# Altium PCB RevB.PcbDoc (part 1 of 2)
Units mm, origin at the board's own origin, x right, y up, seen from the top; angles counter-clockwise.
Board outline 132.46 x 77.34 mm, 2 copper layers (Top Layer, Bottom Layer); 132 components, 78 nets, 535 pads, 141 vias.
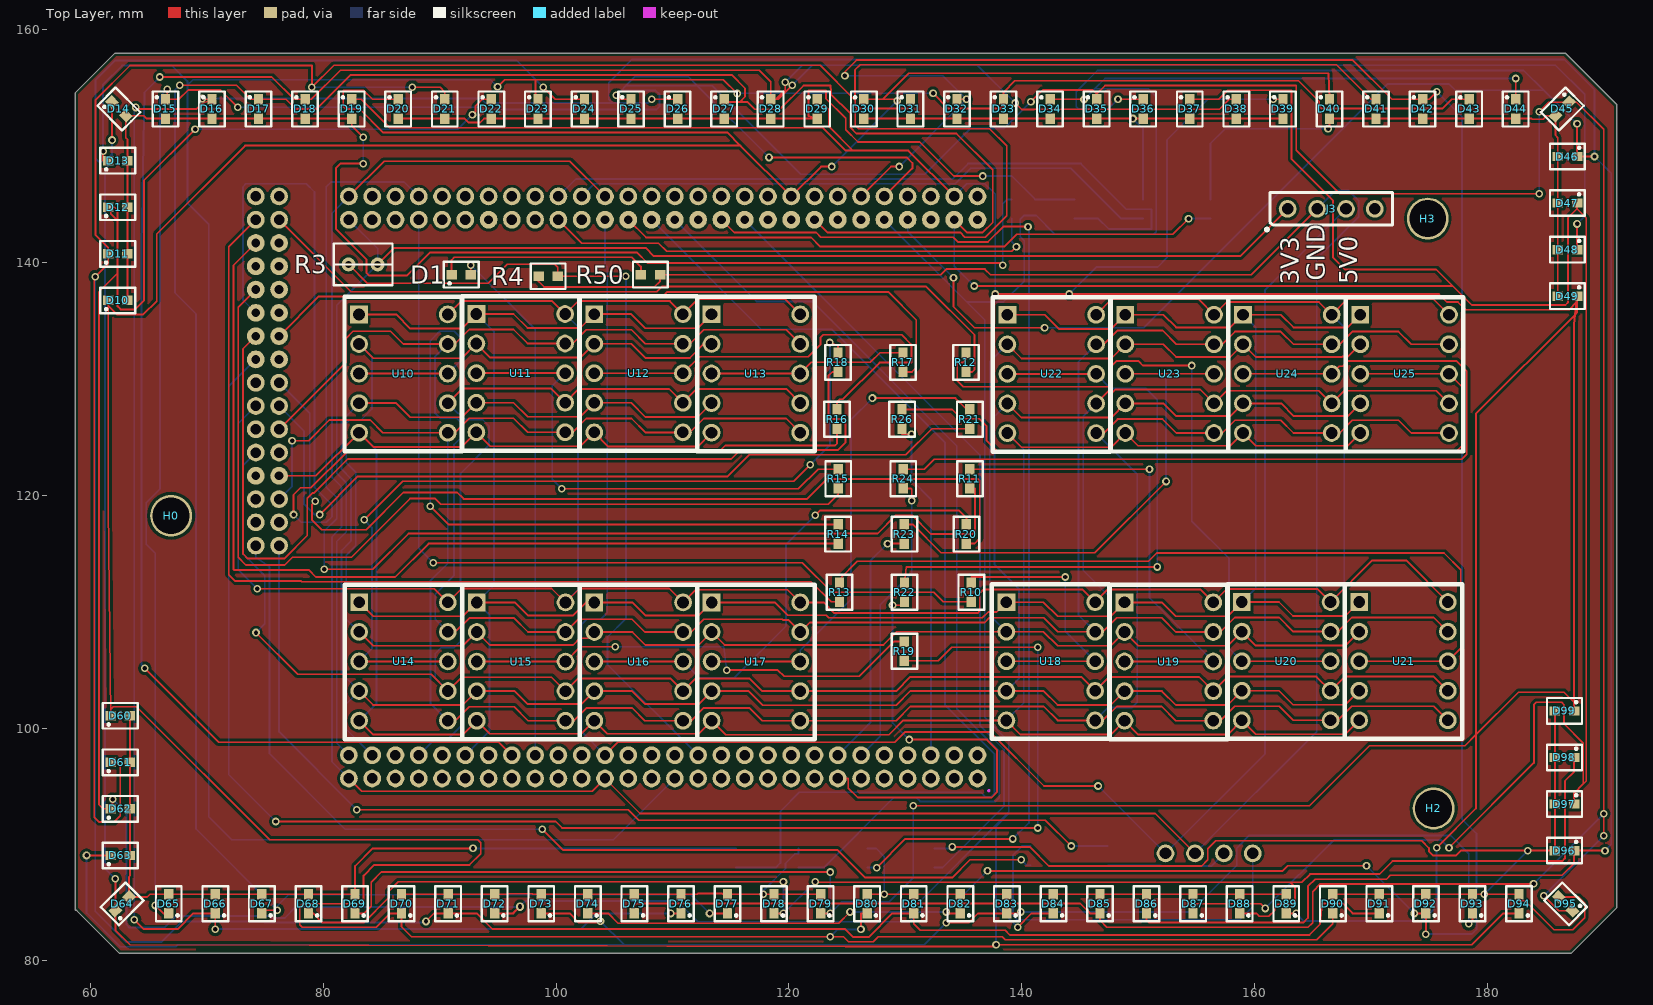
[diagram p0: Top Layer view]
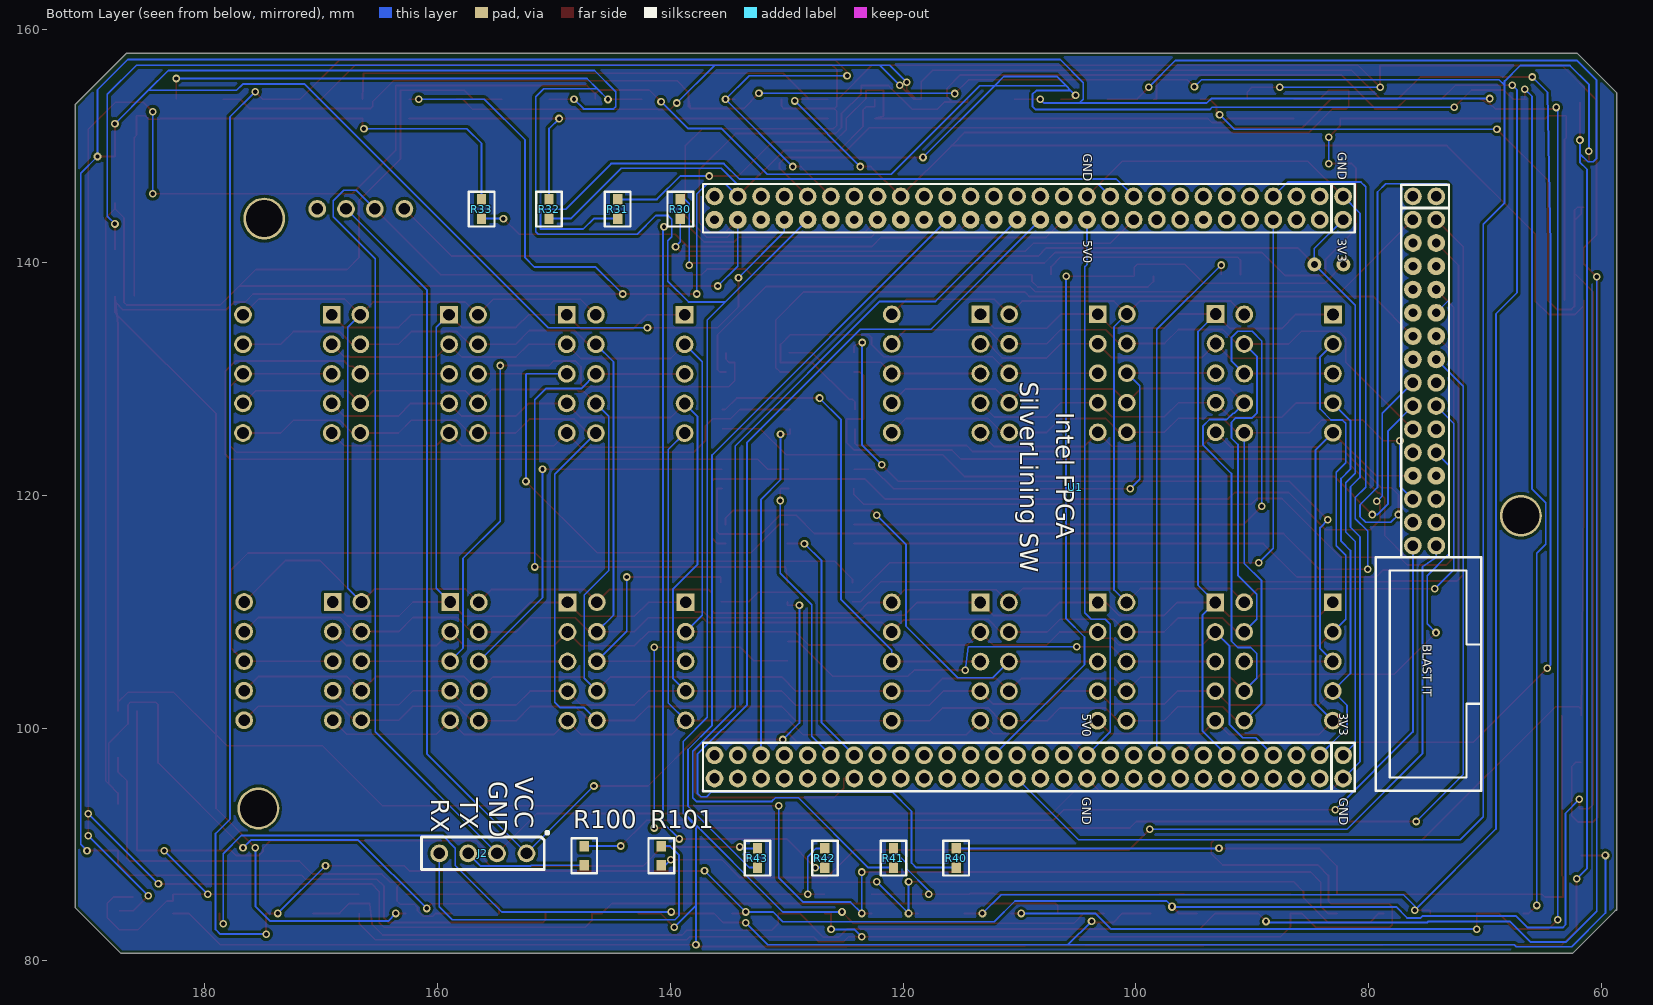
[diagram p1: Bottom Layer view, seen from below]

## Layer stack, top to bottom
Top Solder: solder mask 0.0102, Solder Resist, Dk 3.5
Top Layer: signal copper 0.0356
Dielectric1: dielectric 0.32, FR-4, Dk 4.8
Bottom Layer: signal copper 0.0356
Bottom Solder: solder mask 0.0102, Solder Resist, Dk 3.5

## Board outline
62.23,157.988 62.103,157.988 58.674,154.559 58.674,84.328 58.801,84.328 62.484,80.645 187.198,80.645 191.135,84.582 191.135,153.543 186.69,157.988

## Design rules (kind name [scope] priority, off if disabled: settings)
BoardOutlineClearance [All] p1: gap=0.254 ignorepadtopadclearanceinfootprint=FALSE
Clearance [All] p1: gap=0.254 ignorepadtopadclearanceinfootprint=FALSE except(0: Arc-Hole Track-Hole SMDPad-Hole THPad-Hole Via-Hole Fill-Hole Poly-Hole Region-Hole Text-Hole)
HoleSize [All] p1: absolutevalues=TRUE maxlimit=10 minlimit=0.381 maxpercent=80.000 minpercent=20.000
HoleToHoleClearance [All] p1: gap=0.481 allowstackedmicrovias=TRUE
MinimumAnnularRing [Not IsVia] p1: minimumring=0.18
MinimumSolderMaskSliver [All] p1: minsoldermaskwidth=0.064
PolygonConnect [All] p1: connectstyle=Relief reliefconductorwidth=0.254 reliefentries=4 polygonreliefangle="90 Angle" airgapwidth=0.254
RoomDefinition Uart [InComponentClass('Uart')] p1: confinementstyle=ConfineIn formatcopy=TRUE lockcomponents=FALSE outline 165.811,125.933 165.811,75.133 129.946,75.133 129.946,125.933
RoomDefinition Daylight_Sensor_Network [InComponentClass('Daylight_Sensor_Network')] p2: confinementstyle=ConfineIn formatcopy=TRUE lockcomponents=FALSE outline 77.978,136.144 110.744,136.144 110.744,148.133 77.978,148.133
RoomDefinition AFR_Bar_Termination_Resistors [InComponentClass('AFR_Bar_Termination_Resistors')] p3: confinementstyle=ConfineIn formatcopy=TRUE lockcomponents=FALSE outline 134.235,84.236 112.29,84.236 112.29,92.792 134.235,92.792
RoomDefinition Boost_Bar_Termination_Resistors [InComponentClass('Boost_Bar_Termination_Resistors')] p4: confinementstyle=ConfineIn formatcopy=TRUE lockcomponents=FALSE outline 157.934,140.345 135.988,140.345 135.988,148.545 157.934,148.545
RoomDefinition Core [InComponentClass('Core')] p5: confinementstyle=ConfineIn formatcopy=TRUE lockcomponents=FALSE outline 138.082,152.748 138.082,85.979 68.08,85.979 68.08,152.748
RoomDefinition LED_Readout_Termination_Resistors [InComponentClass('LED_Readout_Termination_Resistors')] p6: confinementstyle=ConfineIn formatcopy=TRUE lockcomponents=FALSE outline 121.234,100.711 138.43,100.711 138.43,135.498 121.234,135.498
RoomDefinition LED_Readout_and_Warning_Lights [InComponentClass('LED_Readout_and_Warning_Lights')] p7: confinementstyle=ConfineIn formatcopy=TRUE lockcomponents=FALSE outline 80.518,89.339 178.689,89.339 178.689,142.044 80.518,142.044
RoomDefinition Hole4 [InComponentClass('Hole4')] p8: confinementstyle=ConfineIn formatcopy=TRUE lockcomponents=FALSE outline 176.911,145.796 172.847,145.796 172.847,139.192 176.911,139.192
RoomDefinition Hole3 [InComponentClass('Hole3')] p9: confinementstyle=ConfineIn formatcopy=TRUE lockcomponents=FALSE outline 173.355,90.424 177.419,90.424 177.419,97.028 173.355,97.028
RoomDefinition Hole1 [InComponentClass('Hole1')] p10: confinementstyle=ConfineIn formatcopy=TRUE lockcomponents=FALSE outline 64.897,116.205 68.961,116.205 68.961,122.809 64.897,122.809
RoomDefinition Debug [InComponentClass('Debug')] p11: confinementstyle=ConfineIn formatcopy=TRUE lockcomponents=FALSE outline 172.136,137.871 172.136,146.304 158.115,146.304 158.115,137.871
RoomDefinition Boost_Bar [InComponentClass('Boost_Bar')] p12: confinementstyle=ConfineIn formatcopy=TRUE lockcomponents=FALSE outline 59.055,133.92 191.77,133.92 191.77,158.623 59.055,158.623
RoomDefinition AFR_bar [InComponentClass('AFR_bar')] p13: confinementstyle=ConfineIn formatcopy=TRUE lockcomponents=FALSE outline 58.166,80.137 192.532,80.137 192.532,104.244 58.166,104.244
RoutingPriority ClockPriority [InNet('XIN') OR InNet('XOUT') OR InNet('XIN32') OR InNet('XOUT32')] p1: routingpriority=80
RoutingPriority PowerPriority [InNet('1V8') OR InNet('3V3') OR InNet('VBAT') OR InNet('5V') OR InNet('GND') OR InNet('VDDANA') OR InNet('VDDUTMI') OR InNet('VDDPLL')] p2: routingpriority=90
RoutingPriority DiffPairsPriority [InNet('CAN_N')   OR InNet('CAN_P') OR InNet('USBD_N') OR InNet('USBD_P') OR InNet('USBH_N') OR InNet('USBH_P')] p3: routingpriority=100
RoutingVias [All] p1: holewidth=0.381 width=0.66 viastyle="Through Hole" minholewidth=0.381 minwidth=0.66 maxholewidth=0.381 maxwidth=0.66
SMDNeckDown [All] p1: percent=200.000
SilkToSilkClearance [All] p1: silktosilkclearance=0.152
SilkToSolderMaskClearance [IsPad] p1: minsilkscreentomaskgap=0.152 clearancetoexposedcopper=TRUE
SolderMaskExpansion [All] p1: expansion=0.102
Width SilkWidth [OnLayer('Top Overlay') or OnLayer('Bottom Overlay')] p1: maxlimit=2.54 minlimit=0.08 preferedwidth=0.127
Width [All] p2: maxlimit=0.2 minlimit=0.152 preferedwidth=0.152
24 further rules are at their usual default settings.

## Classes and differential pairs
component class Daylight_Sensor_Network: R3 R4
component class Uart: J2 R100 R101
component class LED_Readout_Termination_Resistors: R10 R11 R12 R13 R14 R15 R16 R17 R18 R19 R20 R21 R22 R23 R24 R26
component class LED_Readout_and_Warning_Lights: D1 R50 U10 U11 U12 U13 U14 U15 U16 U17 U18 U19 U20 U21 U22 U23 U24 U25
component class Hole4: H3
component class Hole3: H2
component class Hole1: H0
component class Debug: J3
component class Core: U1
component class Boost_Bar: D10 D11 D12 D13 D14 D15 D16 D17 D18 D19 D20 D21 D22 D23 D24 D25 D26 D27 D28 D29 D30 D31 D32 D33 D34 D35 D36 D37 D38 D39 D40 D41 D42 D43 D44 D45 D46 D47 D48 D49
component class Boost_Bar_Termination_Resistors: R30 R31 R32 R33
component class AFR_bar: D60 D61 D62 D63 D64 D65 D66 D67 D68 D69 D70 D71 D72 D73 D74 D75 D76 D77 D78 D79 D80 D81 D82 D83 D84 D85 D86 D87 D88 D89 D90 D91 D92 D93 D94 D95 D96 D97 D98 D99
component class AFR_Bar_Termination_Resistors: R40 R41 R42 R43

## Components (designator, comment, footprint, x,y, rotation, side; value= is the part's Value field where it differs from the comment)
D1 "WARNING" DIODE_0603 91.846,138.945 r180 top locked
D10 "" DIODE_0603 62.353,136.739 r180 top
D11 "" DIODE_0603 62.353,140.739 r180 top
D12 "" DIODE_0603 62.353,144.739 r180 top
D13 "" DIODE_0603 62.353,148.739 r180 top
D14 "" DIODE_0603 62.436,153.184 r135 top
D15 "" DIODE_0603 66.436,153.184 r90 top
D16 "" DIODE_0603 70.436,153.184 r90 top
D17 "" DIODE_0603 74.436,153.184 r90 top
D18 "" DIODE_0603 78.436,153.184 r90 top
D19 "" DIODE_0603 82.436,153.184 r90 top
D20 "" DIODE_0603 86.436,153.184 r90 top
D21 "" DIODE_0603 90.436,153.184 r90 top
D22 "" DIODE_0603 94.436,153.184 r90 top
D23 "" DIODE_0603 98.436,153.184 r90 top
D24 "" DIODE_0603 102.436,153.184 r90 top
D25 "" DIODE_0603 106.436,153.184 r90 top
D26 "" DIODE_0603 110.436,153.184 r90 top
D27 "" DIODE_0603 114.436,153.184 r90 top
D28 "" DIODE_0603 118.436,153.184 r90 top
D29 "" DIODE_0603 122.436,153.184 r90 top
D30 "" DIODE_0603 126.436,153.184 r90 top
D31 "" DIODE_0603 130.436,153.184 r90 top
D32 "" DIODE_0603 134.436,153.184 r90 top
D33 "" DIODE_0603 138.436,153.184 r90 top
D34 "" DIODE_0603 142.436,153.184 r90 top
D35 "" DIODE_0603 146.436,153.184 r90 top
D36 "" DIODE_0603 150.436,153.184 r90 top
D37 "" DIODE_0603 154.436,153.184 r90 top
D38 "" DIODE_0603 158.436,153.184 r90 top
D39 "" DIODE_0603 162.436,153.184 r90 top
D40 "" DIODE_0603 166.436,153.184 r90 top
D41 "" DIODE_0603 170.436,153.184 r90 top
D42 "" DIODE_0603 174.436,153.184 r90 top
D43 "" DIODE_0603 178.436,153.184 r90 top
D44 "" DIODE_0603 182.436,153.184 r90 top
D45 "" DIODE_0603 186.436,153.184 r45 top
D46 "" DIODE_0603 186.88,149.102 r0 top
D47 "" DIODE_0603 186.88,145.102 r0 top
D48 "" DIODE_0603 186.88,141.102 r0 top
D49 "" DIODE_0603 186.88,137.102 r0 top
D60 "" DIODE_0603 62.563,101.056 r180 top
D61 "" DIODE_0603 62.563,97.056 r180 top
D62 "" DIODE_0603 62.563,93.056 r180 top
D63 "" DIODE_0603 62.563,89.056 r180 top
D64 "" DIODE_0603 62.726,84.901 r225 top
D65 "" DIODE_0603 66.726,84.901 r270 top
D66 "" DIODE_0603 70.725,84.901 r270 top
D67 "" DIODE_0603 74.725,84.901 r270 top
D68 "" DIODE_0603 78.726,84.901 r270 top
D69 "" DIODE_0603 82.726,84.901 r270 top
D70 "" DIODE_0603 86.726,84.901 r270 top
D71 "" DIODE_0603 90.726,84.901 r270 top
D72 "" DIODE_0603 94.726,84.901 r270 top
D73 "" DIODE_0603 98.725,84.901 r270 top
D74 "" DIODE_0603 102.725,84.901 r270 top
D75 "" DIODE_0603 106.726,84.901 r270 top
D76 "" DIODE_0603 110.726,84.901 r270 top
D77 "" DIODE_0603 114.726,84.901 r270 top
D78 "" DIODE_0603 118.726,84.901 r270 top
D79 "" DIODE_0603 122.726,84.901 r270 top
D80 "" DIODE_0603 126.725,84.901 r270 top
D81 "" DIODE_0603 130.726,84.901 r270 top
D82 "" DIODE_0603 134.726,84.901 r270 top
D83 "" DIODE_0603 138.726,84.901 r270 top
D84 "" DIODE_0603 142.726,84.901 r270 top
D85 "" DIODE_0603 146.726,84.901 r270 top
D86 "" DIODE_0603 150.725,84.901 r270 top
D87 "" DIODE_0603 154.725,84.901 r270 top
D88 "" DIODE_0603 158.726,84.901 r270 top
D89 "" DIODE_0603 162.726,84.901 r270 top
D90 "" DIODE_0603 166.726,84.901 r270 top
D91 "" DIODE_0603 170.726,84.901 r270 top
D92 "" DIODE_0603 174.726,84.901 r270 top
D93 "" DIODE_0603 178.725,84.901 r270 top
D94 "" DIODE_0603 182.725,84.901 r270 top
D95 "" DIODE_0603 186.726,84.901 r315 top
D96 "" DIODE_0603 186.626,89.476 r0 top
D97 "" DIODE_0603 186.626,93.476 r0 top
D98 "" DIODE_0603 186.626,97.475 r0 top
D99 "" DIODE_0603 186.626,101.475 r0 top
H0 "STANDOFF HOLE" HOLE_3MM 66.929,118.237 r0 top locked
H2 "STANDOFF HOLE" HOLE_3MM 175.387,93.091 r0 top locked
H3 "STANDOFF HOLE" HOLE_3MM 174.879,143.764 r180 top locked
J2 "CONN HEADER R/A SGL 4POS GOLD (display)" HEADER_4POS_UART -1104.697,-1170.483 r270 bottom locked
J3 "Debug port" HEADER_4POS_DEBUG -1094.207,1404.315 r90 top locked
R3 "Daylight photocell to connect in series forming voltage divider" RES_NSL-19M51 84.669,139.827 r180 top
R4 "Figure out ohmage after RevA" RES_0603 99.314,138.811 r0 top value=25K
R10 "Figure out ohmage after RevA" RES_0603 135.676,111.663 r90 top locked value=100
R11 "Figure out ohmage after RevA" RES_0603 135.551,121.409 r90 top locked value=100
R12 "Figure out ohmage after RevA" RES_0603 135.213,131.409 r90 top locked value=100
R13 "Figure out ohmage after RevA" RES_0603 124.351,111.663 r90 top locked value=100
R14 "Figure out ohmage after RevA" RES_0603 124.235,116.663 r90 top locked value=100
R15 "Figure out ohmage after RevA" RES_0603 124.237,121.409 r90 top locked value=100
R16 "Figure out ohmage after RevA" RES_0603 124.137,126.536 r90 top locked value=100
R17 "Figure out ohmage after RevA" RES_0603 129.803,131.409 r90 top locked value=100
R18 "Figure out ohmage after RevA" RES_0603 124.215,131.409 r90 top locked value=100
R19 "Figure out ohmage after RevA" RES_0603 129.921,106.593 r90 top locked value=100
R20 "Figure out ohmage after RevA" RES_0603 135.25,116.663 r90 top locked value=100
R21 "Figure out ohmage after RevA" RES_0603 135.547,126.536 r90 top locked value=100
R22 "Figure out ohmage after RevA" RES_0603 129.939,111.663 r90 top locked value=100
R23 "Figure out ohmage after RevA" RES_0603 129.925,116.663 r90 top locked value=100
R24 "Figure out ohmage after RevA" RES_0603 129.825,121.409 r90 top locked value=100
R26 "Figure out ohmage after RevA" RES_0603 129.725,126.536 r90 top locked value=100
R30 "Figure out ohmage after RevA" RES_0603 139.138,144.583 r90 bottom locked value=100
R31 "Figure out ohmage after RevA" RES_0603 144.522,144.583 r90 bottom locked value=100
R32 "Figure out ohmage after RevA" RES_0603 150.415,144.583 r90 bottom locked value=100
R33 "Figure out ohmage after RevA" RES_0603 156.206,144.583 r90 bottom locked value=100
R40 "Figure out ohmage after RevA" RES_0603 115.439,88.83 r90 bottom locked value=100
R41 "Figure out ohmage after RevA" RES_0603 120.824,88.83 r90 bottom locked value=100
R42 "Figure out ohmage after RevA" RES_0603 126.717,88.83 r90 bottom locked value=100
R43 "Figure out ohmage after RevA" RES_0603 132.508,88.83 r90 bottom locked value=100
R50 "Figure out ohmage after RevA" RES_0603 108.102,138.945 r0 top locked value=100
R100 "0R" RES_0603 147.393,89.033 r90 bottom locked value=50
R101 "Figure out ohmage after RevA" RES_0603 140.767,89.027 r90 bottom locked value=50
U1 "CoreEP3C16" COREEP3C16 106.078,120.135 r270 bottom
U10 "TDSR1050" TDSR1050 83.073,135.533 r0 top locked
U11 "TDSR1050" TDSR1050 93.153,135.573 r0 top
U12 "TDSR1050" TDSR1050 103.273,135.558 r0 top
U13 "TDSR1050" TDSR1050 113.353,135.538 r0 top
U14 "TDSR1050" TDSR1050 83.081,110.802 r0 top
U15 "TDSR1050" TDSR1050 93.185,110.791 r0 top
U16 "TDSR1050" TDSR1050 103.287,110.791 r0 top
U17 "TDSR1050" TDSR1050 113.358,110.791 r0 top
U18 "TDSR1050" TDSR1050 138.684,110.815 r0 top
U19 "TDSR1050" TDSR1050 148.832,110.795 r0 top
U20 "TDSR1050" TDSR1050 158.911,110.826 r0 top
U21 "TDSR1050" TDSR1050 168.989,110.826 r0 top
U22 "TDSR1050" TDSR1050 138.768,135.502 r0 top
U23 "TDSR1050" TDSR1050 148.899,135.509 r0 top
U24 "TDSR1050" TDSR1050 159.004,135.509 r0 top
U25 "TDSR1050" TDSR1050 169.088,135.509 r0 top

## Footprints (in the part's own frame and the unit in brackets; to place one, negate y for a bottom-side part, rotate by r counter-clockwise, add the part's x,y. Pads: shape width x height; smd on the part's side, far side on the other; paste and mask are expansions set on the pad)
COREEP3C16 [mil] "ALTERA Cyclone III FPGA Development Board Full I/O Expander JTAG Interface"
  round 60 hole 35.43: 3V31(-926.55,940.04) 3V32(884.47,940.04) 4(-926.55,625.08) 5(-1005.29,625.08) 5V02(884.47,73.9) 6(-926.55,546.34) 9(-1005.29,546.34) 18(-1005.29,467.6) 19(-926.55,388.86) 20(-1005.29,388.86) 21(-926.55,310.12) 22(-1005.29,310.12) 37(-926.55,231.38) 38(-1005.29,231.38) 39(-926.55,152.64) 41(-1005.29,152.64) 44(-1005.29,-4.84) 46(-1005.29,-83.58) 50(-1005.29,-162.32) 52(-1005.29,-241.06) 56(-1005.29,-319.8) 63(-1005.29,-398.54) 65(-1005.29,-477.28) 69(-1005.29,-556.02) 71(-1005.29,-634.76) 73(-1005.29,-713.5) 78(-1005.29,-792.24) 82(-1005.29,-870.98) 84(-1005.29,-949.72) 86(-1005.29,-1028.46) 93(-1005.29,-1107.21) 95(-1005.29,-1185.95) 100(884.47,-1185.95) 101(963.21,-1185.95) 102(884.47,-1107.21) 103(963.21,-1107.21) 106(884.47,-1028.46) 107(963.21,-1028.46) 108(884.47,-949.72) 110(963.21,-949.72) 111(884.47,-870.98) 112(963.21,-870.98) 113(884.47,-792.24) 114(963.21,-792.24) 117(884.47,-713.5) 118(963.21,-713.5) 119(884.47,-634.76) 120(963.21,-634.76) 126(884.47,-556.02) 127(963.21,-556.02) 128(884.47,-477.28) 131(963.21,-477.28) 132(884.47,-398.54) 133(963.21,-398.54) 134(884.47,-319.8) 135(963.21,-319.8) 137(884.47,-241.06) 139(963.21,-241.06) 142(884.47,-162.32) 143(963.21,-162.32) 144(884.47,-83.58) 145(963.21,-83.58) 146(884.47,-4.84) 147(963.21,-4.84) 148(884.47,152.64) 159(963.21,152.64) 160(884.47,231.38) 161(963.21,231.38) 162(884.47,310.12) 164(963.21,310.12) 166(884.47,388.86) 167(963.21,388.86) 168(884.47,467.6) 169(963.21,467.6) 171(884.47,546.34) 173(963.21,546.34) 174(884.47,625.08) 175(963.21,625.08) 176(884.47,703.82) 177(963.21,703.82) 181(884.47,782.56) 182(963.21,782.56) 183(884.47,861.3) 184(963.21,861.3) 185(175.81,1255) 186(175.81,1176.26) 187(97.07,1255) 188(97.07,1176.26) 189(18.33,1255) 194(18.33,1176.26) 197(-139.15,1255) 198(-139.15,1176.26) 199(-217.89,1255) 200(-217.89,1176.26) 201(-296.63,1255) 202(-296.63,1176.26) 203(-375.37,1255) 207(-375.37,1176.26) 231(-926.55,1255) 232(-926.55,1176.26) 233(-1005.29,1255) 234(-1005.29,1176.26) 235(-1005.29,861.3) 236(-926.55,861.3) 237(-1005.29,782.56) 238(-926.55,782.56) 239(-1005.29,703.82) 240(-926.55,703.82) GND1(-1005.29,940.04) GND2(-1005.29,73.9) GND3(963.21,73.9) GND4(963.21,940.04)
  round 60 hole 29.53: 5V01(-926.55,73.9) 13(-926.55,467.6) 43(-926.55,-4.84) 45(-926.55,-83.58) 49(-926.55,-162.32) 51(-926.55,-241.06) 55(-926.55,-319.8) 57(-926.55,-398.54) 64(-926.55,-477.28) 68(-926.55,-556.02) 70(-926.55,-634.76) 72(-926.55,-713.5) 76(-926.55,-792.24) 81(-926.55,-870.98) 83(-926.55,-949.72) 85(-926.55,-1028.46) 87(-926.55,-1107.21) 94(-926.55,-1185.95) 195(-60.41,1255) 196(-60.41,1176.26) 214(-454.11,1255) 216(-454.11,1176.26) 217(-532.85,1255) 218(-532.85,1176.26) 219(-611.59,1255) 220(-611.59,1176.26) 221(-690.33,1255) 222(-690.33,1176.26) 223(-769.07,1255) 224(-769.07,1176.26) 226(-847.81,1255) 230(-847.81,1176.26)
  Keep-Out Layer lines w10: 1006.06,-1222.56 1003.06,-1225.56
  silkscreen extent -1047,-1225 1007,1407, body extent -1047,-1222 1000,1376, height 394
DIODE_0603 [mm]
  rect 0.9x0.8 smd: 1(-0.825,-0.004) 2(0.826,-0.004)
  silkscreen extent -1.5,-1.1 1.5,1.1, body extent -0.83,-0.45 0.83,0.44, height 0.35
HEADER_4POS_DEBUG [mil] "4 Positions Header, Unshrouded Connector 0.100\" (2.54mm) Through Hole, Right Angle Gold"
  round 60 hole 39.37: 1(-49595,-49490) 2(-49595,-49590) 3(-49595,-49687.5) 4(-49595,-49785)
  silkscreen extent -49670,-49845 -49540,-49415, body extent -49642,-49848 -49545,-49432, height 413
HEADER_4POS_UART [mil] "4 Positions Header, Unshrouded Connector 0.100\" (2.54mm) Through Hole, Right Angle Gold"
  round 60 hole 39.37: 1(-49595,-49490) 2(-49595,-49590) 3(-49595,-49687.5) 4(-49595,-49785)
  silkscreen extent -49670,-49845 -49540,-49415, body extent -49643,-49847 -49228,-49432, height 193
HOLE_3MM [mm] "A 3mm wide drill hole."
  round 3.6 hole 3.175: 0(0,0)
RES_0603 [mm]
  rect 0.9x0.8 smd: 1(-0.819,0.004) 2(0.832,0.004)
  silkscreen extent -1.5,-1.1 1.5,1.1, body extent -0.82,-0.44 0.83,0.45, height 0.35
RES_NSL-19M51 [mm]
  round 1.2 hole 0.6: 1(0,0) 2(2.5,0)
  silkscreen extent -1.27,-1.8 3.77,1.8
TDSR1050 [mil] "High Intensity Red Low Current 7-Segment Display"
  rect 60x60 hole 39.37: 1(0,0)
  round 60 hole 39.37: 2(0,-100) 3(0,-200) 4(0,-300) 5(0,-400) 6(300,-400) 7(300,-300) 8(300,-200) 9(300,-100) 10(300,0)
  silkscreen extent -49,-463 348,60, body extent -35,-451 337,45, height 276

## Part data
D1 D10 D11 D12 D13 D14 D15 D16 D17 D18 D19 D20 D21 D22 D23 D24 D25 D26 D27 D28 D29 D30 D31 D32 D33 D34 D35 D36 D37 D38 D39 D40 D41 D42 D43 D44 D45 D46 D47 D48 D49 D60 D61 D62 D63 D64 D65 D66 D67 D68 D69 D70 D71 D72 D73 D74 D75 D76 D77 D78 D79 D80 D81 D82 D83 D84 D85 D86 D87 D88 D89 D90 D91 D92 D93 D94 D95 D96 D97 D98 D99: library part LED0, "Typical INFRARED GaAs LED", LatestRevisionDate=08-Jul-2005, LatestRevisionNote="Mech Layer 1 removed.", PackageDescription="LED; 2 Leads", PackageReference=LED-0, Published=8-Jun-2000, Publisher="Altium Limited"
H0 H2 H3: library part "3mm HOLE"
J2: "http://multimedia.3m.com/mws/media/548122O/3mtm-pin-strip-header-ts2182.pdf", Supplier Part Number 1=3M9469-ND, Supplier 1=Digi-Key
J3: library part "CONN HEADER R/A SGL 4POS GOLD (debug)", "http://multimedia.3m.com/mws/media/548122O/3mtm-pin-strip-header-ts2182.pdf", Supplier Part Number 1=3M9469-ND, Supplier 1=Digi-Key
R3: library part "PHOTOCELL 16-33KOHM", "http://media.digikey.com/pdf/Data%20Sheets/Photonic%20Detetectors%20Inc%20PDFs/PDV-P8103.pdf", Supplier Part Number 1=PDV-P8103-ND, Supplier 1=Digi-Key
R4 R10 R11 R12 R13 R14 R15 R16 R17 R18 R19 R20 R21 R22 R23 R24 R26 R30 R31 R32 R33 R40 R41 R42 R43 R50 R100 R101: library part Res1, "Resistor", LatestRevisionDate=17-Jul-2002, LatestRevisionNote="Re-released for DXP Platform.", PackageDescription="Axial Device, Thru-Hole; 2 Leads; 0.3 in Pin Spacing", PackageReference=AXIAL-0.3, Published=8-Jun-2000, Publisher="Altium Limited"
U1: "Intel FPGA Core"
U10 U11 U12 U13 U14 U15 U16 U17 U18 U19 U20 U21 U22 U23 U24 U25: "High Intensity Red Low Current 7-Segment Display", Supplier Part Number 1=TDSR1050-ND, Supplier 1=Digi-Key

## Via types
v1: diameter 0.66, hole 0.381, Top Layer to Bottom Layer, 141 vias

## Nets (pads, with @x,y where several pads share a name; then routed paths per layer and width w, separated by ;. In a path a pad name is that pad's centre, name@x,y a point inside that pad or via, vN(x,y) a via of type N, cw(c..) or ccw(c..) an arc to the next point about the centre after c; other vN are vias at no path point)
3V3: J3.1 R3.1 U1.3V31 U1.3V32 | length 130.3
  Top Layer w0.152: R3.1@84.669,139.827 86.091,141.249 107.701,141.249 108.406,140.545 158.782,140.545 J3.1@162.839,144.602
  Bottom Layer w0.152: U1.3V32@82.201,97.669 81.157,98.713 81.157,116.027 81.969,116.84 81.969,121.072 81.157,121.885 81.157,136.315 R3.1@84.669,139.827 84.669,141.201 U1.3V31@82.201,143.669
5V0: J2.1 J3.3 U1.5V01 U1.5V02 | length 163.6
  Top Layer w0.152: U1.5V02@104.201,97.669 105.313,98.781 129.108,98.781 129.997,99.669 137.262,99.669 141.91,95.021 v1(146.558,95.021)
  Bottom Layer w0.152: U1.5V02@104.201,97.669 102.195,99.675 102.195,108.922 102.616,109.344 103.835,109.344 104.394,109.902 104.394,139.624 104.201,139.817 U1.5V01@104.201,143.669 ; v1(146.558,95.021) J2.1@152.349,89.23 160.909,97.79 160.909,137.655 J3.3@167.856,144.602
C0: R10.2 U18.3 U18.8 | length 24.5
  Top Layer w0.152: R10.2@135.672,112.495 135.672,112.979 v1(143.739,112.979) ; U18.3@138.684,105.735 U18.8@146.304,105.735
  Bottom Layer w0.152: v1(143.739,112.979) 143.739,108.301 U18.8@146.304,105.735
C0/IO_VB8N3_240: R10.1 U1.240 | length 77.6
  Top Layer w0.152: v1(89.459,114.198) 121.158,114.198 123.698,111.658 132.434,111.658 133.248,110.844 R10.1@135.672,110.844
  Bottom Layer w0.152: U1.240@88.201,143.669 88.201,115.456 v1(89.459,114.198)
C1: R11.2 U19.3 U19.8 | length 41.8
  Top Layer w0.152: R11.2@135.547,122.241 v1(150.978,122.241) ; U19.3@148.832,105.715 U19.8@156.452,105.715
  Bottom Layer w0.152: v1(150.978,122.241) 150.978,111.19 U19.8@156.452,105.715
C1/IO_VB8N3_239: R11.1 U1.239 | length 105
  Top Layer w0.152: v1(80.086,113.64) 84.252,113.64 87.325,116.713 127.629,116.713 129.191,118.275 130.594,118.275 132.207,116.662 135.738,116.662 135.992,116.916 135.992,120.59 R11.1@135.547,120.59
  Bottom Layer w0.152: v1(80.086,113.64) 80.086,116.926 81.157,117.996 81.157,119.808 80.264,120.701 80.264,146.507 80.67,146.914 86.956,146.914 U1.239@88.201,145.669
C2: R12.2 U20.3 U20.8 | length 60.1
  Top Layer w0.152: R12.2@135.209,132.241 135.209,131.674 134.93,131.394 134.468,131.394 134.468,129.845 134.983,129.33 147.472,129.33 147.676,129.533 147.676,131.064 148.133,131.521 150.038,131.521 150.419,131.14 v1(154.61,131.14) ; U20.3@158.911,105.746 U20.8@166.531,105.746
  Bottom Layer w0.152: v1(154.61,131.14) 154.61,117.78 157.81,114.579 157.81,106.847 U20.3@158.911,105.746
C2/IO_VB8N2_232: R12.1 U1.232 | length 68
  Top Layer w0.152: U1.232@76.201,143.669 82.38,137.49 108.661,137.49 109.093,137.922 131.801,137.922 135.941,133.782 135.941,130.793 135.738,130.59 R12.1@135.209,130.59
C3: R13.2 U21.3 U21.8 | length 71.1
  Top Layer w0.152: R13.2@124.348,112.495 124.348,112.791 125.882,114.325 150.891,114.325 151.602,115.037 176.276,115.037 177.724,113.589 177.724,106.861 U21.8@176.609,105.746 U21.3@168.989,105.746
C3/IO_VB8N2_231: R13.1 U1.231 | length 84.9
  Top Layer w0.152: U1.231@74.201,143.669 71.882,141.35 71.882,113.182 72.441,112.624 78.105,112.624 78.156,112.573 121.895,112.573 123.624,110.844 R13.1@124.348,110.844
C4: R14.2 U10.3 U10.8 | length 64.2
  Top Layer w0.152: U10.3@83.073,130.453 U10.8@90.693,130.453 ; v1(89.179,119.05) 90.734,117.495 R14.2@124.232,117.495
  Bottom Layer w0.152: v1(89.179,119.05) 89.179,133.248 90.018,134.087 91.237,134.087 91.796,133.528 91.796,131.555 U10.8@90.693,130.453
C4/IO_VB8N2_226: R14.1 U1.226 | length 82.2
  Top Layer w0.152: U1.226@74.201,141.669 72.288,139.756 72.288,113.603 72.303,113.589 78.74,113.589 79.35,112.979 86.182,112.979 89.047,115.844 R14.1@124.232,115.844
C5: R15.2 U11.3 U11.8 | length 42.8
  Top Layer w0.152: U11.3@93.153,130.493 U11.8@100.773,130.493 ; v1(100.482,120.548) 120.812,120.548 122.504,122.241 R15.2@124.234,122.241
  Bottom Layer w0.152: v1(100.482,120.548) 99.67,121.361 99.67,129.389 U11.8@100.773,130.493
C5/IO_VB8N2_221: R15.1 U1.221 | length 78.9
  Top Layer w0.152: U1.221@74.201,137.669 72.695,136.163 72.695,114.67 73.355,114.01 76.688,114.01 77.359,114.681 82.423,114.681 87.452,119.71 89.611,119.71 90.094,119.228 123.37,119.228 124.234,120.091 R15.1@124.234,120.59
C6: R16.2 U12.3 U12.8 | length 39.3
  Top Layer w0.152: U12.3@103.273,130.478 U12.8@110.893,130.478 112.317,131.902 121.666,131.902 122.719,132.955 122.719,133.564 122.936,133.782 129.693,133.782 130.53,132.944 130.53,131.394 127.787,131.394 124.638,128.245 124.358,128.245 124.134,128.02 R16.2@124.134,127.368
C6/IO_VB8N1_219: R16.1 U1.219 | length 101.6
  Top Layer w0.152: v1(77.445,118.339) 77.445,120.045 78.045,120.646 78.939,120.646 82.042,123.749 114.021,123.749 114.554,124.282 123.977,124.282 124.134,124.439 R16.1@124.134,125.717
  Bottom Layer w0.152: U1.219@74.201,135.669 73.101,136.769 73.101,146.507 73.355,146.761 78.537,146.761 79.248,146.05 79.248,120.675 80.75,119.173 80.75,118.165 80.264,117.678 78.105,117.678 v1(77.445,118.339)
C7: R17.2 U13.3 U13.8 | length 17.2
  Top Layer w0.152: U13.3@113.353,130.458 U13.8@120.973,130.458 121.935,131.42 127,131.42 127.821,132.241 R17.2@129.8,132.241
C7/IO_VB8N0_218: R17.1 U1.218 | length 62.7
  Top Layer w0.152: U1.218@76.201,133.669 79.616,137.084 109.184,137.084 109.565,137.465 128.524,137.465 130.937,135.052 130.937,130.964 130.563,130.59 R17.1@129.8,130.59
C8: R18.2 U14.3 U14.8 | length 73.3
  Top Layer w0.152: U14.3@83.081,105.722 U14.8@90.701,105.722 ; v1(83.515,117.881) 86.842,121.209 120.421,121.209 v1(121.844,122.631) ; v1(123.52,133.121) 124.212,132.836 R18.2@124.212,132.241
  Bottom Layer w0.152: U14.3@83.081,105.722 84.174,106.814 84.174,117.223 v1(83.515,117.881) ; v1(121.844,122.631) 123.52,124.308 v1(123.52,133.121)
C8/IO_VB8N0_217: R18.1 U1.217 | length 85.3
  Top Layer w0.152: U1.217@74.201,133.669 73.101,132.569 73.101,114.96 73.508,114.554 76.632,114.554 78.617,116.539 78.617,119.753 79.045,120.181 79.176,120.181 82.109,123.114 115.037,123.114 115.799,123.876 124.197,123.876 124.866,124.545 124.866,126.543 123.393,126.543 123.393,130.251 123.732,130.59 R18.1@124.212,130.59
C9: R19.2 U15.3 U15.8 | length 40.5
  Top Layer w0.152: U15.3@93.185,105.711 U15.8@100.805,105.711 102.079,106.985 v1(105.08,106.985) ; v1(114.656,104.978) 119.05,104.978 119.583,104.445 126.035,104.445 129.015,107.425 R19.2@129.917,107.425
  Bottom Layer w0.152: v1(105.08,106.985) 114.402,106.985 v1(114.656,104.978)
C9/IO_VB8N0_214: R19.1 U1.214 | length 135.5
  Top Layer w0.152: v1(75.921,91.973) 99.954,91.973 100.512,91.415 v1(141.376,91.415) ; R19.1@129.917,105.774 132.842,105.774 134.002,106.934 v1(141.376,106.934)
  Bottom Layer w0.152: U1.214@74.201,131.669 71.882,129.35 71.882,96.012 v1(75.921,91.973) ; v1(141.376,91.415) v1(141.376,106.934)
C10: R20.2 U16.3 U16.8 | length 43.4
  Top Layer w0.152: U16.3@103.287,105.711 U16.8@110.907,105.711 ; v1(122.25,118.288) 122.644,118.681 134.624,118.681 135.246,118.059 R20.2@135.246,117.495
  Bottom Layer w0.152: U16.8@110.907,105.711 112.3,104.318 115.316,104.318 119.761,108.763 119.761,115.799 v1(122.25,118.288)
C10/IO_VB7N3_207: R20.1 U1.207 | length 79.5
  Top Layer w0.152: v1(79.299,119.482) 79.023,119.206 79.023,117.903 79.883,117.043 83.693,117.043 86.893,120.244 91.491,120.244 92.05,119.685 121.564,119.685 123.266,121.387 136.246,121.387 136.398,121.234 136.398,116.301 135.941,115.844 R20.1@135.246,115.844
  Bottom Layer w0.152: U1.207@76.201,129.669 78.842,127.028 78.842,119.939 v1(79.299,119.482)
C11: R21.2 U17.3 U17.8 | length 41.6
  Top Layer w0.152: U17.3@113.358,105.711 U17.8@120.978,105.711 ; v1(127.178,128.346) 134.302,128.346 135.28,127.368 R21.2@135.543,127.368
  Bottom Layer w0.152: U17.8@120.978,105.711 120.978,106.68 125.324,111.025 125.324,126.492 v1(127.178,128.346)
C11/IO_VB7N3_202: R21.1 U1.202 | length 69.9
  Top Layer w0.152: v1(79.684,118.339) 82.96,121.615 114.732,121.615 116.586,123.469 130.048,123.469 132.295,125.717 R21.1@135.543,125.717
  Bottom Layer w0.152: U1.202@76.201,127.669 78.337,125.533 78.337,119.278 79.277,118.339 v1(79.684,118.339)
C12: R22.2 U22.3 U22.8 | length 51.1
  Top Layer w0.152: R22.2@129.936,112.495 130.088,113.843 v1(151.638,113.843) ; U22.3@138.768,130.422 U22.8@146.388,130.422
  Bottom Layer w0.152: U22.8@146.388,130.422 147.651,129.159 150.698,129.159 151.638,128.219 v1(151.638,113.843)
C12/IO_VB4N0_118: R22.1 U1.118 | length 40
  Top Layer w0.152: U1.118@124.201,95.669 125.095,95.669 125.095,94.844 125.908,94.031 137.414,94.031 137.871,94.488 137.871,98.146 137.008,99.009 v1(130.327,99.009) ; v1(128.905,110.541) 129.936,110.541 R22.1@129.936,110.844
  Bottom Layer w0.152: v1(128.905,110.541) 128.905,100.432 v1(130.327,99.009)
C13: R23.2 U23.3 U23.8 | length 46.3
  Top Layer w0.152: R23.2@129.922,117.495 130.632,117.495 133.065,115.062 146.279,115.062 v1(152.4,121.183) ; U23.3@148.899,130.429 U23.8@156.519,130.429
  Bottom Layer w0.152: U23.3@148.899,130.429 152.324,130.429 152.4,130.353 v1(152.4,121.183)
C13/IO_VB4N0_117: R23.1 U1.117 | length 21.4
  Top Layer w0.152: v1(128.473,115.844) R23.1@129.922,115.844
  Bottom Layer w0.152: U1.117@124.201,97.669 127,100.468 127,114.371 v1(128.473,115.844)
C14: R24.2 U24.3 U24.8 | length 76.1
  Top Layer w0.152: R24.2@129.822,122.241 131.623,122.241 132.47,123.088 177.8,123.088 178.232,123.52 178.232,130.658 177.368,131.521 167.996,131.521 167.564,131.089 167.284,131.089 U24.8@166.624,130.429 U24.3@159.004,130.429
C14/IO_VB4N0_113: R24.1 U1.113 | length 25.4
  Top Layer w0.152: R24.1@129.822,120.59 130.464,120.59 130.556,120.498 v1(130.556,119.545)
  Bottom Layer w0.152: U1.113@126.201,97.669 127.838,99.306 127.838,110.592 130.556,113.309 v1(130.556,119.545)
C15: R26.2 U25.3 U25.8 | length 64.8
  Top Layer w0.152: R26.2@129.722,127.368 134.024,127.368 134.823,126.568 136.347,126.568 136.982,125.933 136.982,124.689 137.973,123.698 177.267,123.698 177.825,124.257 177.825,129.311 U25.8@176.708,130.429 U25.3@169.088,130.429
C15/IO_VB4N2_106: R26.1 U1.106 | length 29.5
  Top Layer w0.152: R26.1@129.722,125.717 129.722,125.247 v1(130.531,125.247)
  Bottom Layer w0.152: v1(130.531,125.247) 130.531,121.336 132.201,119.665 U1.106@132.201,97.669
C_a/IO_VB7N2_201: U1.201 U10.10 U11.10 U12.10 U13.10 U14.10 U15.10 U16.10 U17.10 U18.10 U19.10 U20.10 U21.10 U22.10 U23.10 U24.10 U25.10 | length 248
  Top Layer w0.152: v1(74.32,111.963) 89.54,111.963 U14.10@90.701,110.802 91.888,111.989 99.608,111.989 U15.10@100.805,110.791 102.006,111.993 109.705,111.993 U16.10@110.907,110.791 112.002,111.887 119.882,111.887 U17.10@120.978,110.791 122.99,110.791 123.903,109.879 136.218,109.879 136.403,110.064 136.403,111.562 136.754,111.912 145.207,111.912 U18.10@146.304,110.815 147.402,111.912 155.335,111.912 U19.10@156.452,110.795 157.594,111.938 165.419,111.938 U20.10@166.531,110.826 170.106,114.402 173.034,114.402 U21.10@176.609,110.826 ; U10.10@90.693,135.533 91.838,136.677 99.669,136.677 U11.10@100.773,135.573 101.878,136.677 109.774,136.677 U12.10@110.893,135.558 112.165,136.83 119.682,136.83 U13.10@120.973,135.538 ; U22.10@146.388,135.502 147.716,136.83 155.198,136.83 U23.10@156.519,135.509 157.611,136.601 165.532,136.601 U24.10@166.624,135.509 167.97,136.855 175.362,136.855 U25.10@176.708,135.509
  Bottom Layer w0.152: U1.201@74.201,127.669 72.695,126.163 72.695,113.589 v1(74.32,111.963) ; U11.10@100.773,135.573 101.879,134.467 101.879,111.866 U15.10@100.805,110.791 ; U20.10@166.531,110.826 167.716,112.012 167.716,134.417 U24.10@166.624,135.509
C_b/IO_VB7N2_200: U1.200 U10.9 U11.9 U12.9 U13.9 U14.9 U15.9 U16.9 U17.9 U18.9 U19.9 U20.9 U21.9 U22.9 U23.9 U24.9 U25.9 | length 233
  Top Layer w0.152: U1.200@76.201,125.669 81.966,131.434 81.966,133.502 82.55,134.087 85.774,134.087 86.868,132.993 U10.9@90.693,132.993 91.288,132.993 92.534,134.239 96.342,134.239 97.548,133.033 U11.9@100.773,133.033 101.422,133.033 102.603,134.214 106.477,134.214 107.672,133.018 U12.9@110.893,133.018 111.504,133.018 112.7,134.214 119.758,134.214 U13.9@120.973,132.998 ; U14.9@90.701,108.262 91.345,108.262 92.532,109.449 96.39,109.449 97.587,108.251 U15.9@100.805,108.251 101.901,109.347 106.524,109.347 107.62,108.251 U16.9@110.907,108.251 111.604,108.251 112.7,109.347 119.425,109.347 119.48,109.293 119.937,109.293 U17.9@120.978,108.251 121.793,109.066 136.807,109.066 137.216,109.474 141.884,109.474 143.084,108.275 U18.9@146.304,108.275 146.959,108.275 148.158,109.474 152.02,109.474 153.238,108.255 U19.9@156.452,108.255 157.049,108.255 158.293,109.499 162.109,109.499 163.322,108.286 U20.9@166.531,108.286 167.138,108.286 168.351,109.499 175.396,109.499 U21.9@176.609,108.286 ; U22.9@146.388,132.962 147.033,132.962 148.234,134.163 152.095,134.163 153.289,132.969 U23.9@156.519,132.969 157.226,132.969 158.318,134.061 162.255,134.061 163.347,132.969 U24.9@166.624,132.969 167.31,132.969 168.402,134.061 172.364,134.061 173.457,132.969 U25.9@176.708,132.969
  Bottom Layer w0.152: U10.9@90.693,132.993 89.586,131.885 89.586,127.076 90.018,126.644 91.415,126.644 91.786,126.273 91.786,124.907 91.237,124.358 91.237,113.132 89.609,111.504 89.609,109.354 U14.9@90.701,108.262 ; U18.9@146.304,108.275 144.882,109.698 144.882,131.455 U22.9@146.388,132.962
C_c/IO_VB7N2_197: U1.197 U10.7 U11.7 U12.7 U13.7 U14.7 U15.7 U16.7 U17.7 U18.7 U19.7 U20.7 U21.7 U22.7 U23.7 U24.7 U25.7 | length 251.3
  Top Layer w0.152: v1(74.219,108.204) 77.8,104.623 89.261,104.623 U14.7@90.701,103.182 91.888,104.369 99.608,104.369 U15.7@100.805,103.171 101.901,104.267 109.811,104.267 U16.7@110.907,103.171 112.002,104.267 116.608,104.267 117.704,103.171 U17.7@120.978,103.171 129.21,103.171 130.432,104.394 145.105,104.394 U18.7@146.304,103.195 147.503,104.394 155.233,104.394 U19.7@156.452,103.175 157.696,104.419 165.318,104.419 U20.7@166.531,103.206 167.744,104.419 175.396,104.419 U21.7@176.609,103.206 ; U10.7@90.693,127.913 91.939,129.159 99.567,129.159 U11.7@100.773,127.953 101.954,129.134 109.698,129.134 U12.7@110.893,127.938 112.089,129.134 119.758,129.134 U13.7@120.973,127.918 ; U22.7@146.388,127.882 147.43,128.923 147.887,128.923 148.046,129.083 155.325,129.083 U23.7@156.519,127.889 157.611,128.981 165.532,128.981 U24.7@166.624,127.889 167.716,128.981 175.616,128.981 U25.7@176.708,127.889
  Bottom Layer w0.152: U1.197@74.201,123.669 73.109,122.577 73.109,114.953 74.981,113.081 74.981,108.966 v1(74.219,108.204) ; U10.7@90.693,127.913 91.554,127.052 91.645,127.052 92.192,126.505 93.675,126.505 94.246,125.935 94.246,124.321 91.796,121.871 91.796,107.482 91.237,106.923 90.127,106.923 89.609,106.406 89.609,104.274 U14.7@90.701,103.182 ; U18.7@146.304,103.195 147.397,104.287 147.397,111.429 145.288,113.538 145.288,126.782 U22.7@146.388,127.882
C_d/IO_VB7N2_196: U1.196 U10.5 U11.5 U12.5 U13.5 U14.5 U15.5 U16.5 U17.5 U18.5 U19.5 U20.5 U21.5 U22.5 U23.5 U24.5 U25.5 | length 219.5
  Top Layer w0.152: U1.196@76.201,121.669 79.369,121.669 U10.5@83.073,125.373 84.291,124.155 91.896,124.155 U11.5@93.153,125.413 94.36,124.206 102.081,124.206 U12.5@103.273,125.398 104.491,124.181 112.156,124.181 U13.5@113.353,125.378 ; U14.5@83.081,100.642 84.282,99.441 91.995,99.441 U15.5@93.185,100.631 94.299,99.517 102.173,99.517 U16.5@103.287,100.631 104.401,99.517 112.244,99.517 U17.5@113.358,100.631 114.574,99.416 128.601,99.416 129.84,100.655 U18.5@138.684,100.655 139.898,99.441 147.637,99.441 U19.5@148.832,100.635 150.026,99.441 157.685,99.441 U20.5@158.911,100.666 160.111,99.466 167.79,99.466 U21.5@168.989,100.666 ; U22.5@138.768,125.342 139.98,124.13 147.68,124.13 U23.5@148.899,125.349 149.991,124.257 157.912,124.257 U24.5@159.004,125.349 160.096,124.257 167.996,124.257 U25.5@169.088,125.349
  Bottom Layer w0.152: U10.5@83.073,125.373 84.58,123.866 84.58,102.14 U14.5@83.081,100.642 ; U18.5@138.684,100.655 140.183,102.153 140.183,123.927 U22.5@138.768,125.342